# EAGLE board Mainboard (EAGLE 7.7.0)
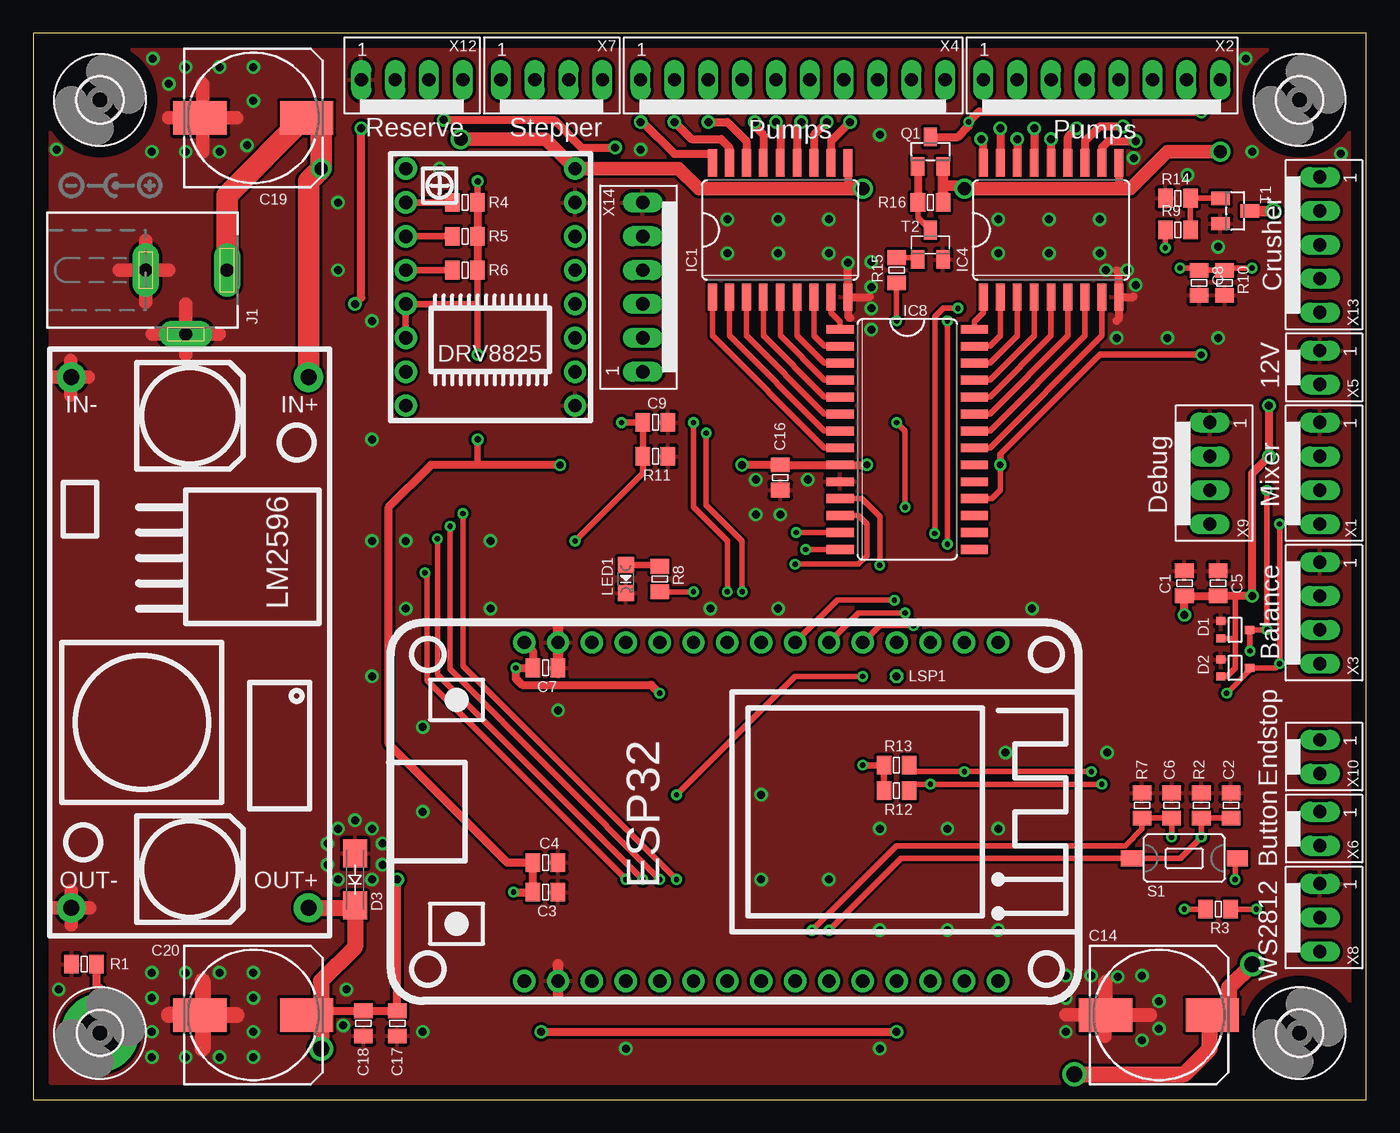
[diagram p0: board, top side]
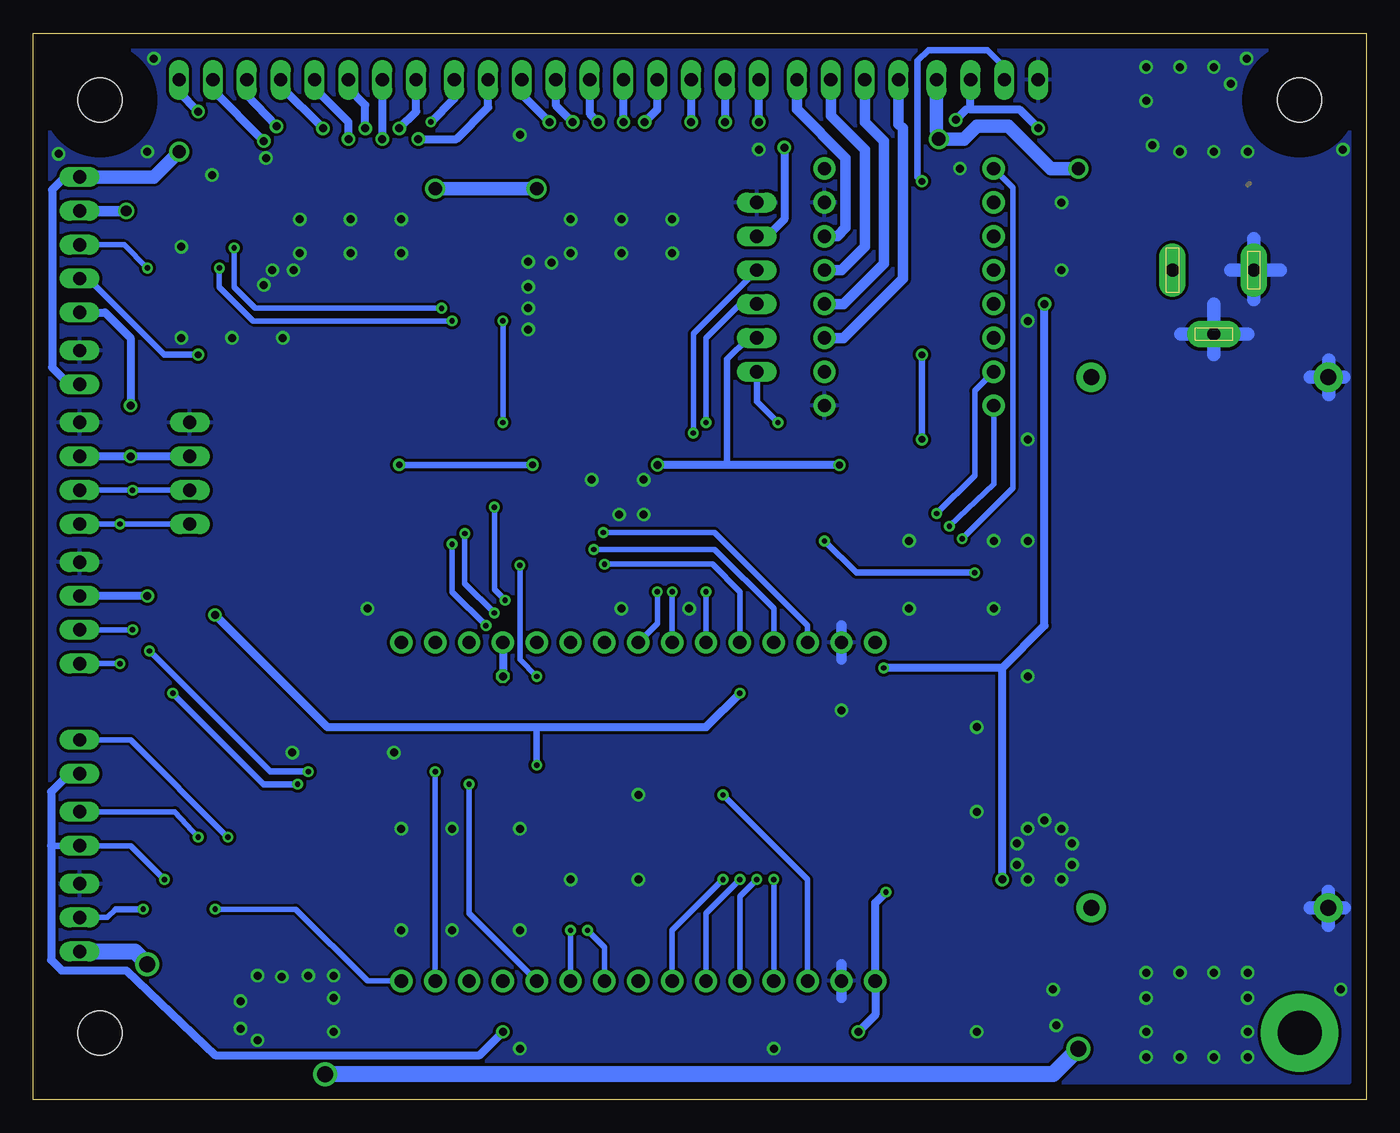
[diagram p1: board, bottom side, seen from below]

Size 100 x 80 mm. Coordinates in mm from the lower left corner, seen from the top.
Outline: 0,0 100,0 100,80 0,80 0,0
Copper layers (1*16): Top 0.035mm / dielectric 1.5mm / Bottom 0.035mm
Design rules "default": minimum track width 8mil, minimum drill 24mil, track to track 8mil, track to pad 8mil, pad to pad 8mil, via to via 8mil, smd to smd 8mil, copper to edge 40mil, drill to drill 8mil, minimum pad ring 8mil, minimum via ring 8mil, stop-mask expansion 0mil, vias tented up to drill 25mil, thermal gap 10mil

## Footprints (pad centres in the part's own frame; a part is rotated, then mirrored left to right if it is on the bottom)
0805CRH = smd 1.092 x 1.397: 1 -0.94,0; 2 0.94,0
153CLV-1010 = smd 4 x 2.5: + 4,0; - -4,0
SOT323-3 = smd 0.6 x 0.7: 1 -0.65,-1.075; 2 0.65,-1.075; 3 0,1.075
SMA-DO214AC = smd 2.1 x 1.8: A -1.95,0; K 1.95,0
STEPDOWN_MODUL = drill 1.2 pad 2.184: IN+ -8.89,-19.9; IN- 8.89,-19.9; OUT+ -8.89,19.9; OUT- 8.89,19.9
3,3-PAD = drill 3.3 pad 5.842: B3,3 0,0
3,3 = hole 3.3: 0,0
SO18W = smd 0.66 x 2.032: 1 -5.08,-5.029; 2 -3.81,-5.029; 3 -2.54,-5.029; 4 -1.27,-5.029; 5 0,-5.029; 6 1.27,-5.029; 7 2.54,-5.029; 8 3.81,-5.029; 9 5.08,-5.029; 10 5.08,5.029; 11 3.81,5.029; 12 2.54,5.029; 13 1.27,5.029; 14 0,5.029; 15 -1.27,5.029; 16 -2.54,5.029; 17 -3.81,5.029; 18 -5.08,5.029
ESP32 = drill 1 pad 1.676: 3V3 12.7,-12.7; D2 12.7,-5.08; D4 12.7,-2.54; D5 12.7,5.08; D12 -12.7,-5.08; D13 -12.7,-7.62; D14 -12.7,-2.54; D15 12.7,-7.62; D18 12.7,7.62; D19 12.7,10.16; D21 12.7,12.7; D22 12.7,20.32; D23 12.7,22.86; D25 -12.7,5.08; D26 -12.7,2.54; D27 -12.7,0; D32 -12.7,10.16; D33 -12.7,7.62; D34 -12.7,15.24; D35 -12.7,12.7; EN -12.7,22.86; GND@1 -12.7,-10.16; GND@2 12.7,-10.16; RX0 12.7,15.24; RX2 12.7,0; TX0 12.7,17.78; TX2 12.7,2.54; VIN -12.7,-12.7; VN -12.7,17.78; VP -12.7,20.32
DRV8825 = drill 1 pad 1.676: 1A -6.35,1.27; 1B -6.35,-1.27; 2A -6.35,3.81; 2B -6.35,-3.81; DIR 6.35,8.89; EN 6.35,-8.89; FLT -6.35,6.35; GND@1 -6.35,8.89; GND@2 -6.35,-6.35; M0 6.35,-6.35; M1 6.35,-3.81; M2 6.35,-1.27; RST 6.35,1.27; SLP 6.35,3.81; STP 6.35,6.35; VMOT -6.35,-8.89
SOIC-28 = smd 0.66 x 2.032: 1 -8.255,-5.029; 2 -6.985,-5.029; 3 -5.715,-5.029; 4 -4.445,-5.029; 5 -3.175,-5.029; 6 -1.905,-5.029; 7 -0.635,-5.029; 8 0.635,-5.029; 9 1.905,-5.029; 10 3.175,-5.029; 11 4.445,-5.029; 12 5.715,-5.029; 13 6.985,-5.029; 14 8.255,-5.029; 15 8.255,5.029; 16 6.985,5.029; 17 5.715,5.029; 18 4.445,5.029; 19 3.175,5.029; 20 1.905,5.029; 21 0.635,5.029; 22 -0.635,5.029; 23 -1.905,5.029; 24 -3.175,5.029; 25 -4.445,5.029; 26 -5.715,5.029; 27 -6.985,5.029; 28 -8.255,5.029
DCJ0202 = drill 1 pad 2 long: 1 0,3.1; 2 4.8,0; 3 0,-3
CHIPLED_0805 = smd 1.2 x 1.2: A 0,-1.05; C 0,1.05
LSP06 = drill 0.61 octagon: MP 0,0
SOT23 = smd 1 x 1.4: 1 -0.95,-1.1; 2 0.95,-1.1; 3 0,1.1
DTSM3XN = smd 1.6 x 1.2: 1 -3.97,0; 2 3.97,0
SOT23-BEC = smd 1 x 1.4: B -0.95,-1.1; C 0,1.1; E 0.95,-1.1
NSL25-4G = drill 1 long: 1 -3.81,0; 2 -1.27,0; 3 1.27,0; 4 3.81,0
NSL25-8G = drill 1 long: 1 -8.89,0; 2 -6.35,0; 3 -3.81,0; 4 -1.27,0; 5 1.27,0; 6 3.81,0; 7 6.35,0; 8 8.89,0
NSL25-10G = drill 1 long: 1 -11.43,0; 2 -8.89,0; 3 -6.35,0; 4 -3.81,0; 5 -1.27,0; 6 1.27,0; 7 3.81,0; 8 6.35,0; 9 8.89,0; 10 11.43,0
NSL25-2G = drill 1 long: 1 -1.27,0; 2 1.27,0
NSL25-3G = drill 1 long: 1 -2.54,0; 2 0,0; 3 2.54,0
NSL25-5G = drill 1 long: 1 -5.08,0; 2 -2.54,0; 3 0,0; 4 2.54,0; 5 5.08,0
NSL25-6G = drill 1 long: 1 -6.35,0; 2 -3.81,0; 3 -1.27,0; 4 1.27,0; 5 3.81,0; 6 6.35,0

## Placement (x,y rotation side)
C1  100n  [0805CRH]  86.36,38.73 90 top
C2  100n  [0805CRH]  89.85,22.07 90 top
C3  100n  [0805CRH]  38.42,15.56 0 top
C4  2u2  [0805CRH]  38.42,17.78 0 top
C5  2u2  [0805CRH]  88.9,38.73 90 top
C6  100n  [0805CRH]  85.41,22.07 90 top
C7  100n  [0805CRH]  38.42,32.38 0 top
C8  100n  [0805CRH]  87.47,61.28 270 top
C9  100n  [0805CRH]  46.67,50.8 0 top
C14  220µ/35V  [153CLV-1010]  84.45,6.35 0 top
C16  100n  [0805CRH]  56.04,46.67 270 top
C17  100n  [0805CRH]  27.3,5.71 270 top
C18  2u2  [0805CRH]  24.77,5.71 270 top
C19  100µ/50V  [153CLV-1010]  16.51,73.66 0 top
C20  220µ/35V  [153CLV-1010]  16.51,6.35 0 top
D1  NUP1301U  [SOT323-3]  90.17,35.24 270 top
D2  NUP1301U  [SOT323-3]  90.17,32.38 270 top
D3  SMAJ5.0CA  [SMA-DO214AC]  24.13,16.51 270 top
DC1  STEPDOWN_MODUL  [STEPDOWN_MODUL]  11.75,34.29 180 top
H1  MOUNT-PAD-ROUND3.3  [3,3-PAD]  5,5 0 top
H2  MOUNT-HOLE3.3  [3,3]  5,75 0 top
H3  MOUNT-HOLE3.3  [3,3]  95,75 0 top
H4  MOUNT-HOLE3.3  [3,3]  95,5 0 top
IC1  ULN2803LW  [SO18W]  56.04,65.25 0 top
IC3  ESP32  [ESP32]  49.53,21.59 270 top
IC4  ULN2803LW  [SO18W]  76.36,65.25 0 top
IC7  DRV8825  [DRV8825]  34.29,60.96 180 top
IC8  MCP23S17  [SOIC-28]  65.56,49.53 270 top
J1  DCJ0202  [DCJ0202]  11.43,62.23 270 top
LED1  [CHIPLED_0805]  44.45,39.05 180 top
LSP1  LSP06  [LSP06]  64.77,31.75 0 top
Q1  BSS84  [SOT23]  67.31,71.12 0 top
R1  n.c.  [0805CRH]  3.81,10.16 0 top
R2  10k  [0805CRH]  87.63,22.07 90 top
R3  470R  [0805CRH]  88.9,14.29 180 top
R4  n.c.  [0805CRH]  32.38,67.31 180 top
R5  10k  [0805CRH]  32.38,64.77 180 top
R6  n.c.  [0805CRH]  32.38,62.23 180 top
R7  10k  [0805CRH]  83.19,22.07 90 top
R8  330R  [0805CRH]  46.99,39.05 90 top
R9  1k  [0805CRH]  85.88,65.25 0 top
R10  10k  [0805CRH]  89.38,61.28 270 top
R11  10k  [0805CRH]  46.67,48.26 0 top
R12  1k  [0805CRH]  64.77,23.18 0 top
R13  1k  [0805CRH]  64.77,25.08 0 top
R14  100k  [0805CRH]  85.88,67.63 0 top
R15  1k  [0805CRH]  64.77,62.23 90 top
R16  10k  [0805CRH]  67.31,67.31 0 top
S1  SMD_TASTER_EBAY  [DTSM3XN]  86.36,18.1 180 top
T1  BSS138  [SOT23]  90.17,66.67 270 top
T2  BC817-25SMD  [SOT23-BEC]  67.31,64.14 0 top
X1  NSL25-4G  [NSL25-4G]  96.52,46.99 270 top
X2  NSL25-8G  [NSL25-8G]  80.17,76.52 0 top
X3  NSL25-4G  [NSL25-4G]  96.52,36.51 270 top
X4  NSL25-10G  [NSL25-10G]  56.99,76.52 0 top
X5  NSL25-2G  [NSL25-2G]  96.52,54.93 270 top
X6  NSL25-2G  [NSL25-2G]  96.52,20.32 270 top
X7  NSL25-4G  [NSL25-4G]  38.89,76.52 0 top
X8  NSL25-3G  [NSL25-3G]  96.52,13.65 270 top
X9  NSL25-4G  [NSL25-4G]  88.27,46.99 270 top
X10  NSL25-2G  [NSL25-2G]  96.52,25.72 270 top
X12  NSL25-4G  [NSL25-4G]  28.42,76.52 0 top
X13  NSL25-5G  [NSL25-5G]  96.52,64.14 270 top
X14  NSL25-6G  [NSL25-6G]  45.72,60.96 90 top

## Library data of the parts
C1-C9 C14 C16-C20 R1-R16 = rcl_jci
D1 D2 = Diode
D3 = Eltra_Teile
DC1 = Powersupply
H1-H4 = holes_jci
IC1 IC4 = uln-udn_jci
IC3 = ESP
IC7 = Stepper Driver
IC8 = IO-Extender
J1 = con-jack; OC_FARNELL: unknown; OC_NEWARK: unknown
LED1 = led_jci
LSP1 = solpad_jci
Q1 T1 = mosfet_jci
S1 = switch
T2 = transistor_jci
X1-X10 X12-X14 = con-nsk_jci

## Nets
12V_PWM: Q1.3 X2.8 X4.10
+3V3: C3.1 C4.1 C16.1 IC3.3V3 IC7.RST IC7.SLP IC8.9 IC8.18 R4.1 R5.1 R6.1 S1.1 X6.2 X10.2 X12.2 X13.4 X14.2
+5V: C1.1 C5.1 C7.1 C14.+ C17.1 C18.1 C20.+ D1.2 D2.2 D3.K DC1.OUT+ IC3.VIN R12.1 R13.1 X1.2 X3.2 X8.3 X9.2 X12.3 X13.5 X14.5
+12V: C19.+ DC1.IN+ IC1.10 IC4.10 IC7.VMOT J1.1 Q1.2 R16.2 X5.2 X12.4 X13.1
ADC3/VN: IC3.VN
BUTTON: C2.1 IC3.D19 R2.1 S1.2 X6.1
CRUSHER: IC3.D32 R9.1
CRUSHER_SENSE: C8.1 IC3.D35 R10.1 X13.3
ENDSTOP: C6.1 IC3.D18 R7.1 X10.1
GND: C1.2 C2.2 C3.2 C4.2 C5.2 C6.2 C7.2 C8.2 C9.2 C14.- C16.2 C17.2 C18.2 C19.- C20.- D1.1 D2.1 D3.A DC1.IN- DC1.OUT- IC1.9 IC3.GND@1 IC3.GND@2 IC4.9 IC7.GND@1 IC7.GND@2 IC8.10 J1.2 J1.3 LED1.C R1.1 R2.2 R7.2 R10.2 R11.2 R14.1 T1.2 T2.E X1.1 X3.1 X5.1 X8.1 X9.1 X12.1 X14.6
I2C_SCL: D1.3 IC3.D22 R13.2 X1.3 X3.3 X9.3
I2C_SDA: D2.3 IC3.D21 R12.2 X1.4 X3.4 X9.4
IO_SPI_CLK: IC3.D14 IC8.12
IO_SPI_CS: IC3.D15 IC8.11
IO_SPI_MISO: IC3.D12 IC8.14
IO_SPI_MOSI: IC3.D13 IC8.13
LED: IC3.D27 R8.1
N$4: LED1.A R8.2
N$5: T1.3 X13.2
N$6: R9.2 R14.2 T1.1
N$7: Q1.1 R16.1 T2.C
N$8: R15.2 T2.B
N$10: IC3.D34 LSP1.MP
N$25: R3.1 X8.2
N$28: H1.B3,3 R1.2
N$29: IC4.8 IC8.21
N$31: IC4.7 IC8.22
N$38: IC4.6 IC8.23
N$49: IC4.5 IC8.24
N$50: IC4.4 IC8.25
N$51: IC4.3 IC8.26
N$52: IC4.2 IC8.27
N$53: IC1.18 X4.1
N$54: IC1.17 X4.2
N$55: IC1.16 X4.3
N$56: IC1.15 X4.4
N$57: IC1.14 X4.5
N$58: IC1.13 X4.6
N$59: IC1.12 X4.7
N$60: IC1.11 X4.8
N$61: IC4.18 X4.9
N$62: IC4.17 X2.1
N$63: IC4.16 X2.2
N$64: IC4.15 X2.3
N$65: IC4.14 X2.4
N$66: IC4.13 X2.5
N$67: IC4.12 X2.6
N$68: IC4.11 X2.7
N$71: IC4.1 IC8.28
N$72: IC1.8 IC8.1
N$73: IC7.M0 R4.2
N$74: IC7.M1 R5.2
N$75: IC7.M2 R6.2
N$76: IC1.7 IC8.2
N$77: IC1.6 IC8.3
N$78: IC1.5 IC8.4
N$79: IC1.4 IC8.5
N$80: IC1.3 IC8.6
N$81: IC1.2 IC8.7
N$82: IC1.1 IC8.8
PUMP_PWM: IC3.D33 R15.1
SERVO_1: IC3.D25 X14.4
SERVO_2: IC3.D26 X14.3
SERVO_ENDSTOP: C9.1 IC3.D2 R11.1 X14.1
STEP_1A: IC7.1A X7.2
STEP_1B: IC7.1B X7.3
STEP_2A: IC7.2A X7.1
STEP_2B: IC7.2B X7.4
STEP_DIR: IC3.RX2 IC7.DIR
STEP_EN: IC3.D4 IC7.EN
STEP_STP: IC3.TX2 IC7.STP
WS2812: IC3.D23 R3.2

## Tracks (layer width: path | path; a pad name or v marks a point on that pad's centre or on a via)
12V_PWM  (via drill 0.4 pad 0.4, 0.6)
  Top 0.6: Q1.3 69.36,72.22 70.17,73.03 v70.17,73.34 70.96,74.14 v87.63,74.14
  Bottom 0.6: v70.17,73.34 68.42,75.09 X4.10 | v87.63,74.14 89.06,75.56 X2.8
+3V3  (via drill 0.4, 0.5, 0.5 pad 0.5, 0.6)
  Top 0.4: IC8.18 71.91,45.09 72.55,45.72 v72.55,47.62 | S1.1 90.17,17.94 v90.17,16.51
  Top 0.5: R4.1 33.33,68.89 v33.34,68.9 | v87.63,55.88 80.01,55.88 72.55,48.42 v72.55,47.62 | R6.1 33.33,59.69 | 33.33,59.69 IC7.RST IC7.SLP | 33.33,59.69 33.33,55.89 v33.34,55.88 | v33.34,49.53 33.34,47.77 33.5,47.61
  Top 0.6: R4.1 R5.1 R6.1 | v36.04,15.56 C3.1 C4.1 35.56,17.78 26.67,26.67 26.67,44.45 29.83,47.61 33.5,47.61 v39.52,47.61 | v53.17,47.61 C16.1 IC8.9 v62.55,47.62 | v38.1,5.08 v64.77,5.08
  Bottom 0.4: v90.17,16.51 92.71,19.05 X6.2
  Bottom 0.5: v33.34,68.9 33.66,69.22 33.66,77.95 32.86,78.74 28.42,78.74 27.15,77.47 X12.2 | X6.2 98.66,19.05 | v87.63,55.88 90.17,55.88 95.89,61.59 X13.4 | 48.26,47.61 47.94,47.61 47.94,55.56 46.35,57.15 X14.2 | v62.55,47.62 v72.55,47.62 | v33.34,55.88 v33.34,49.53
  Bottom 0.6: X10.2 97.31,24.45 98.66,23.1 98.66,19.05 98.66,10.48 97.87,9.68 93.03,9.68 86.36,3.33 66.52,3.33 v64.77,5.08 | v36.04,15.56 36.83,14.76 IC3.3V3 36.83,6.35 v38.1,5.08 | v39.52,47.61 48.26,47.61 v53.17,47.61
+5V  (via drill 0.4, 0.6, 1.2)
  Top 0.4: 90.17,37.8 90.17,34.59 | 90.17,34.59 90.17,32.38 89.53,31.75 89.11,31.75 D2.2 | D1.2 90.17,34.59
  Top 0.5: R12.1 R13.1 v62.23,25.08
  Top 0.6: C20.+ 20.82,6.66 21.59,6.66 C18.1 C17.1 v27.3,16.51 | v24.13,59.69 24.61,60.17 v24.61,72.87 | v30.8,73.5 39.05,73.5 41.12,71.44 v43.66,71.44 | v86.36,36.35 C1.1 C5.1 90.17,37.8 91.43,37.8 v91.44,37.78 91.44,46.99 v92.71,48.26 v92.71,52.07 | IC3.VIN 37.48,33.64 C7.1 v36.2,32.38 36.2,31.59 36.67,31.11 46.35,31.11 v46.99,30.48
  Top 1: 88.74,6.35 C14.+ 88.27,6.16 | 20.82,6.66 21.29,6.66 21.59,6.35 | 20.64,6.48 C20.+ | 24.13,14.39 D3.K
  Top 1.2: v91.44,10.16 89.69,8.41 89.69,7.3 88.74,6.35 | 21.59,6.35 v21.59,3.81 | v78.11,1.91 86.36,1.91 88.27,3.81 88.27,6.16 | DC1.OUT+ 24.13,14.39 | D3.K 24.13,11.43 21.59,8.89 21.59,6.66
  Bottom 0.5: 62.23,27.94 v62.23,25.08
  Bottom 0.6: v27.3,16.51 27.3,32.38 | 27.3,32.38 v36.2,32.38 | 27.3,32.38 24.13,35.56 v24.13,59.69 | 29.69,74.3 26.04,74.3 v24.61,72.87 | v91.44,37.78 X3.2 | X9.2 v92.71,48.26 X1.2 | 29.69,74.3 X12.3 | v43.66,71.44 43.66,66.04 44.93,64.77 X14.5 | 29.69,74.3 30,74.3 v30.8,73.5 | v86.36,36.35 77.95,27.94 62.23,27.94 49.53,27.94 v46.99,30.48 | X13.5 94.61,59.05 92.71,57.15 v92.71,52.07
  Bottom 1.2: X8.3 92.39,11.11 v91.44,10.16 | v78.11,1.91 23.5,1.91 v21.59,3.81
+12V  (via drill 1)
  Top 0.6: IC4.10 81.44,68.34 | IC1.10 61.12,68.34
  Top 0.8: 68.26,69.93 Q1.2 68.26,68.58 | 68.26,68.58 R16.2 | v69.85,68.34 69.85,68.58 68.26,68.58
  Top 1: v69.85,68.34 81.44,68.34 82.31,68.34 85.09,71.12 v89.06,71.12 | v32.07,72.07 38.42,72.07 IC7.VMOT 48.42,69.85 49.93,68.34 61.12,68.34 v62.23,68.34
  Top 1.6: J1.1 14.53,67.87 20.32,73.66 C19.+ 21.59,73.66 v21.59,69.85 20.64,68.9 DC1.IN+
  Bottom 0.6: X5.2 97.31,53.66 98.58,54.93 98.58,68.26 97.63,69.22 X13.1
  Bottom 1: v21.59,69.85 23.65,69.85 26.83,73.02 29.21,73.03 30.16,72.07 v32.07,72.07 32.23,72.71 X12.4 | v89.06,71.12 90.96,69.22 X13.1 | v62.23,68.34 v69.85,68.34
BUTTON  (via drill 0.4, 0.4 pad 0.41)
  Top 0.4: v59.69,12.7 65.09,18.1 S1.2 86.04,18.1 v87.63,19.68 R2.1 | 87.62,21.11 R2.1 | R2.1 C2.1
  Bottom 0.4: v59.69,12.7 IC3.D19 | X6.1 89.38,21.59 v87.63,19.68
CRUSHER  (via drill 0.4, 0.4 pad 0.41)
  Top 0.4: IC3.D32 61.91,36.51 v65.41,36.51 | v69.37,59.37 68.26,59.37 67.63,58.74 v67.63,42.47 | 84.94,64.07 R9.1
  Top 0.5: v84.93,63.9 84.94,64.07
  Bottom 0.4: v84.93,63.9 84.93,60.96 83.34,59.37 v69.37,59.37 | v65.41,36.51 67.63,38.73 v67.63,42.47
CRUSHER_SENSE  (via drill 0.4, 0.4 pad 0.41)
  Top 0.4: v86.04,62.39 87.31,62.39 C8.1 | C8.1 R10.1 89.55,62.39 v91.44,62.39 | v68.58,58.42 v68.58,41.67 | IC3.D35 63.5,35.56 v66.04,35.56
  Top 0.5: C8.1
  Bottom 0.4: v68.58,58.42 83.5,58.42 86.04,60.96 v86.04,62.39 | v66.04,35.56 68.58,38.1 v68.58,41.67 | v91.44,62.39 93.19,64.14 X13.3
ENDSTOP  (via drill 0.4, 0.4 pad 0.41)
  Top 0.4: v58.42,12.7 64.77,19.05 81.92,19.05 83.19,20.32 R7.1 83.33,21.11 83.34,21.13 C6.1 v85.41,19.68
  Bottom 0.4: IC3.D18 57.15,11.43 v58.42,12.7 | v85.41,19.68 92.71,26.99 X10.1
GND  (via drill 0.6)
  Top 0.6: IC1.9 62.76,60.22 | IC1.9 61.12,58.82 61.28,58.66 | IC1.9 v61.12,62.79 | IC4.9 82.52,60.22 82.55,60.25 | IC4.9 81.44,58.58 81.28,58.42 | IC4.9 81.44,62.07 81.28,62.23
  Top 0.8: 39.37,10.16 IC3.GND@2 39.37,7.62 | 39.37,35.56 IC3.GND@1 39.37,33.02
  Top 1: C20.- 12.7,6.16 12.7,6.35 | 1.67,14.39 4.23,14.39 | 2.83,13.1 2.83,15.66 | 1.67,54.19 4.1,54.19 | 2.8,52.86 2.8,55.46 | J1.2 | J1.2 11.43,55.88 | J1.2 11.43,59.69 | J1.2 13.93,57.43 | J1.2 8.93,57.43 | 8.41,59.85 8.41,64.45 | 10.16,62.23 6.43,62.23 | 12.7,73.66 C19.- 10.16,73.66 | 12.7,73.66 15.24,73.66 | 12.7,73.66 12.7,76.2 | 12.7,73.66 12.7,71.12 | C14.- 80.45,8.86 80.41,8.81 80.41,6.33 | 80.41,6.33 80.41,4.76 | 80.41,6.33 83.8,6.33 83.82,6.35 77.47,6.35
  Top 1.2: 12.7,6.16 12.7,3.81 | 12.7,8.89 12.7,6.35 | 12.7,6.35 15.24,6.35 | 12.7,6.35 10.16,6.35
  Bottom 0.8: 39.37,7.62 IC3.GND@2 39.37,10.16 | 39.37,35.56 IC3.GND@1 39.37,33.02
  Bottom 1: 4.21,14.39 1.64,14.39 | 2.83,15.64 2.83,13.07 | 2.8,55.48 2.8,52.89 | 4.21,54.19 1.69,54.19 | 8.89,57.43 11.39,57.43 | 13.89,57.43 11.39,57.43 11.43,57.47 | 11.43,57.47 11.43,59.69 | 11.43,57.47 11.43,55.88 | 10.16,62.23 6.43,62.23 | 8.41,64.61 8.41,60.01
  other vias: 8.97,78.11 1.75,71.28 10.16,76.2 16.51,74.93 16.51,77.47 13.97,77.47 11.43,77.47 11.43,71.12 13.97,71.12 16.03,71.6 8.89,71.12 1.91,8.26 8.89,3.17 11.43,3.17 13.97,3.17 16.51,3.17 16.51,5.08 16.51,7.62 16.51,9.53 13.97,9.53 11.43,9.53 8.89,9.53 8.89,7.62 8.89,5.08 23.5,8.26 22.86,16.51 22.07,17.62 22.07,19.21 22.86,20.32 25.4,20.32 25.4,16.51 26.19,17.62 26.19,19.21 24.13,20.95 23.26,5.56 29.21,5.08 63.5,3.81 44.45,3.81 77.47,5.08 83.19,4.45 81.36,9.21 77.47,7.62 79.38,9.29 83.19,9.29 77.47,9.29 84.45,5.32 84.45,7.38 63.5,12.7 72.39,12.7 68.58,12.7 63.5,20.32 59.69,16.51 54.61,16.51 54.61,22.86 72.95,26.04 80.57,26.04 58.1,46.51 54.21,46.51 56.04,43.89 54.21,43.89 62.87,57.78 62.87,62.87 62.87,60.96 62.87,59.37 82.71,61.12 80.49,62.23 82.07,62.23 86.6,69.37 88.9,63.98 68.58,20.32 72.39,20.32 52.07,63.5 52.07,66.04 55.88,66.04 59.69,66.04 55.88,63.5 59.69,63.5 72.39,63.5 72.39,66.04 76.2,66.04 76.2,63.5 80.01,63.5 80.01,66.04 82.55,70.64 98.11,70.96 90.96,78.11 91.44,71.12 63.5,72.39 45.56,71.28 30.48,69.85 22.86,67.31 22.86,62.23 25.4,58.42 25.4,49.53 25.4,41.91 27.94,41.91 27.94,36.83 25.4,31.75 29.21,27.94 29.21,21.59 39.37,29.21 34.29,36.83 34.29,41.91 50.8,36.83 55.88,36.83 74.93,36.83 81.28,57.15 85.09,57.15 88.9,57.15
  pour Top (isolate 0.22): 98.75,1.27 98.73,78.73 24.13,78.73 1.27,78.73 1.27,1.27
  pour Bottom (isolate 0.22): 1.27,1.27 98.75,1.27 98.73,78.73 1.27,78.73
I2C_SCL  (via drill 0.4)
  Top 0.4: v92.55,45.72 v92.55,35.24 D1.3 91.28,35.21 v91.28,33.66 | R13.2 66.19,24.61 v69.85,24.61 v79.38,24.61
  Bottom 0.4: X9.3 v92.55,45.72 X1.3 | v92.55,35.24 X3.3 | v69.85,24.61 IC3.D22 | 91.28,33.5 v91.28,33.66
  Bottom 0.5: v79.38,24.61 82.23,24.61 v91.28,33.66
I2C_SDA  (via drill 0.4)
  Top 0.4: v80.17,23.65 v67.31,23.65 66.19,23.65 R12.2 | D2.3 93.19,32.38 v93.5,32.7 v93.5,43.18 | D2.3 91.28,32.35 | v89.53,30.48 91.25,32.19 D2.3
  Bottom 0.4: X9.4 v93.5,43.18 X1.4 | X3.4 v93.5,32.7 | v67.31,23.65 67.31,13.97 IC3.D21
  Bottom 0.5: v80.17,23.65 82.71,23.65 v89.53,30.48
IO_SPI_CLK  (via drill 0.4 pad 0.4)
  Top 0.4: IC8.12 61.91,43.81 62.55,43.18 62.55,40.8 61.91,40.16 v57.15,40.16
  Bottom 0.4: IC3.D14 46.99,38.1 49.05,40.16 v57.15,40.16
IO_SPI_CS  (via drill 0.4)
  Top 0.4: IC8.11 62.15,45.09 63.5,43.74 v63.5,40.08 | v62.23,31.75 57.15,31.75 v48.26,22.86
  Bottom 0.4: v63.5,40.08 63.5,33.02 v62.23,31.75 | v48.26,22.86 41.91,16.51 IC3.D15
IO_SPI_MISO  (via drill 0.4)
  Top 0.4: v57.94,41.27 IC8.14
  Bottom 0.4: v57.94,41.27 48.9,41.27 44.45,36.83 IC3.D12
IO_SPI_MOSI  (via drill 0.4 pad 0.4)
  Top 0.4: IC8.13 v57.23,42.55
  Bottom 0.4: IC3.D13 41.91,35.56 48.9,42.55 v57.23,42.55
LED  (via drill 0.4)
  Top 0.4: v49.53,38.1 47,38.1 R8.1
  Bottom 0.4: v49.53,38.1 IC3.D27
N$4
  Top 0.5: LED1.A 46.88,40.1 R8.2
N$5  (via drill 0.8)
  Top 0.8: T1.3 v93.03,66.67
  Bottom 0.8: v93.03,66.67 X13.2
N$6
  Top 0.4: R9.2 R14.2 T1.1
N$7
  Top 0.4: R16.1 66.37,66.17 T2.C
  Top 0.6: Q1.1 R16.1
N$8
  Top 0.4: R15.2 66.22,63.17 T2.B
N$10
  Bottom 0.6: IC3.D34 LSP1.MP
N$25  (via drill 0.4)
  Top 0.4: v91.76,14.29 R3.1
  Bottom 0.4: X8.2 94.46,13.65 93.82,14.29
  Bottom 0.5: 93.82,14.29 v91.76,14.29
N$28
  Top 0.6: H1.B3,3 5.08,5.08 5.08,8.26 4.75,8.59 R1.2
N$29
  Top 0.4: IC4.8 80.17,57.31 71.75,48.9 IC8.21
N$31
  Top 0.4: IC4.7 78.9,57.31 71.75,50.16 IC8.22
N$38
  Top 0.4: IC4.6 77.63,57.31 71.75,51.44 IC8.23
N$49
  Top 0.4: IC4.5 76.36,57.31 71.75,52.7 IC8.24
N$50
  Top 0.4: IC4.4 75.09,57.31 71.75,53.98 IC8.25
N$51
  Top 0.4: IC4.3 73.82,57.31 71.75,55.24 IC8.26
N$52
  Top 0.4: IC4.2 72.55,57.31 71.75,56.52 IC8.27
N$53  (via drill 0.6)
  Top 0.6: v45.56,73.34 45.72,73.34 48.1,70.96 50.96,70.96 IC1.18
  Bottom 0.6: v45.56,73.34 X4.1
N$54  (via drill 0.6)
  Top 0.6: v48.1,73.34 49.37,72.07 51.59,72.07 52.23,71.44 IC1.17
  Bottom 0.6: X4.2 v48.1,73.34
N$55  (via drill 0.6)
  Top 0.6: v50.64,73.34 52.07,73.34 53.5,71.91 IC1.16
  Bottom 0.6: X4.3 v50.64,73.34
N$56  (via drill 0.6)
  Top 0.6: IC1.15 54.77,72.39 54.13,73.03 v54.13,73.34
  Bottom 0.6: X4.4 53.18,74.29 v54.13,73.34
N$57  (via drill 0.6)
  Top 0.6: v55.72,73.34 56.04,72.86 IC1.14
  Bottom 0.6: v55.72,73.34 X4.5
N$58  (via drill 0.6)
  Top 0.6: v57.63,73.34 57.31,73.02 IC1.13
  Bottom 0.6: X4.6 58.26,73.98 v57.63,73.34
N$59  (via drill 0.6)
  Top 0.6: v59.53,73.34 58.58,72.39 IC1.12
  Bottom 0.6: X4.7 60.8,74.61 v59.53,73.34
N$60  (via drill 0.6)
  Top 0.6: v61.28,73.34 59.85,71.91 IC1.11
  Bottom 0.6: X4.8 63.34,75.41 v61.28,73.34
N$61  (via drill 0.6 pad 0.4)
  Top 0.6: IC4.18 71.28,71.91 v71.12,72.07
  Bottom 0.6: v71.12,72.07 68.26,72.07 65.88,74.45 X4.9
N$62  (via drill 0.6)
  Top 0.6: v72.55,72.87 IC4.17
  Bottom 0.6: X2.1 71.28,74.14 v72.55,72.87
N$63  (via drill 0.6)
  Top 0.6: v73.82,72.07 IC4.16
  Bottom 0.6: X2.2 v73.82,72.07
N$64  (via drill 0.6)
  Top 0.6: v75.09,72.87 IC4.15
  Bottom 0.6: v75.09,72.87 75.09,74.61 76.36,75.88 X2.3
N$65  (via drill 0.6)
  Top 0.6: v76.36,72.07 IC4.14
  Bottom 0.6: v76.36,72.07 76.36,73.34 78.9,75.88 X2.4
N$66  (via drill 0.6)
  Top 0.6: IC4.13 77.63,72.23 v78.26,72.87
  Bottom 0.6: v78.26,72.87 81.44,76.04 X2.5
N$67  (via drill 0.6)
  Top 0.6: IC4.12 78.9,71.91 80.01,73.03 v81.76,73.03
  Bottom 0.6: 83.98,75.88 X2.6 83.98,75.41 v81.76,73.03
N$68  (via drill 0.6)
  Top 0.6: IC4.11 80.17,71.44 80.64,71.91 v82.71,71.91
  Bottom 0.6: v82.71,71.91 86.52,75.72 X2.7
N$71
  Top 0.4: IC8.28 70.59,58.37 71.28,59.05 IC4.1
N$72
  Top 0.4: IC8.1 60.53,58.37 59.85,59.05 IC1.8
N$73
  Top 0.5: R4.2 IC7.M0
N$74
  Top 0.5: R5.2 IC7.M1
N$75
  Top 0.5: R6.2 IC7.M2
N$76
  Top 0.4: IC1.7 58.58,57.31 59.37,56.52 IC8.2
N$77
  Top 0.4: IC8.3 59.37,55.24 57.31,57.31 IC1.6
N$78
  Top 0.4: IC8.4 59.37,53.98 56.04,57.31 IC1.5
N$79
  Top 0.4: IC1.4 54.77,57.31 59.37,52.7 IC8.5
N$80
  Top 0.4: IC1.3 53.5,57.31 59.37,51.44 IC8.6
N$81
  Top 0.4: IC1.2 52.23,57.31 59.37,50.16 IC8.7
N$82
  Top 0.4: IC1.1 50.96,57.31 59.37,48.9 IC8.8
PUMP_PWM  (via drill 0.4 pad 0.41)
  Top 0.4: IC3.D33 60.33,37.47 v64.61,37.47 | R15.1 v64.77,58.42 | v64.77,50.8 65.41,50.16 v65.41,44.45
  Bottom 0.4: v64.77,58.42 v64.77,50.8 | v64.61,37.47 65.41,38.26 v65.41,44.45
SERVO_1  (via drill 0.4 pad 0.4)
  Top 0.4: v53.18,38.1 53.18,41.91 50.48,44.61 v50.48,50.01
  Bottom 0.4: IC3.D25 53.18,35.72 v53.18,38.1 | v50.48,50.01 50.48,57.47 X14.4
SERVO_2  (via drill 0.4 pad 0.4)
  Top 0.4: v52.07,38.1 52.07,41.91 49.53,44.45 v49.53,50.8
  Bottom 0.4: IC3.D26 v52.07,38.1 | v49.53,50.8 49.53,57.15 46.99,59.69 X14.3
SERVO_ENDSTOP  (via drill 0.4)
  Top 0.4: v44.45,16.51 29.53,31.43 29.53,39.37
  Top 0.5: v44.13,50.8 C9.1 R11.1 45.73,47 v40.64,41.91 | 29.53,39.37 v29.37,39.53
  Bottom 0.4: IC3.D2 v44.45,16.51
  Bottom 0.5: v29.37,39.53 38.26,39.53 v40.64,41.91 | v44.13,50.8 45.72,52.39 X14.1
STEP_1A
  Bottom 0.8: IC7.1A 39.21,59.69 36.2,62.7 36.2,71.91 37.62,73.34 X7.2
STEP_1B
  Bottom 0.8: IC7.1B 39.37,62.23 37.62,63.98 37.62,71.28 40.16,73.82 X7.3
STEP_2A
  Bottom 0.8: IC7.2A 39.21,57.15 34.77,61.59 34.77,72.87 35.08,73.18 X7.1
STEP_2B
  Bottom 0.8: IC7.2B 39.69,64.77 39.05,65.4 39.05,70.64 42.7,74.29 X7.4
STEP_DIR  (via drill 0.4)
  Top 0.4: v31.27,43.02 31.27,32.31 v46.99,16.51
  Bottom 0.4: IC7.DIR 27.94,46.2 v31.27,43.02 | IC3.RX2 49.53,13.97 v46.99,16.51
STEP_EN  (via drill 0.4)
  Top 0.4: v45.72,16.51 30.32,31.91 v30.32,42.07
  Bottom 0.4: IC3.D4 46.99,15.24 v45.72,16.51 | IC7.EN 26.51,68.42 26.51,45.88 v30.32,42.07
STEP_STP  (via drill 0.4)
  Top 0.4: v32.23,43.97 32.23,32.54 v48.26,16.51
  Bottom 0.4: v32.23,43.97 29.37,46.83 29.37,53.18 IC7.STP | IC3.TX2 52.07,12.7 v48.26,16.51
WS2812  (via drill 0.4)
  Top 0.4: R3.2 v86.36,14.29
  Bottom 0.4: v86.36,14.29 80.33,14.29 74.93,8.89 IC3.D23

## Text on the board
tPlace: Reserve | Stepper | Pumps | Pumps | Crusher | 12V | Debug | Mixer | Balance | Endstop | Button | WS2812